# Altium PCB STM32_PCB.PcbDoc
Units mm, origin at the board's own origin, x right, y up, seen from the top; angles counter-clockwise.
Board outline 40.5 x 40 mm, 4 copper layers (L1 (Signal), L2 (GND), L3 (GND), L4 (Signal)), stack 1.57 mm thick; 49 components, 31 nets, 181 pads, 86 vias.
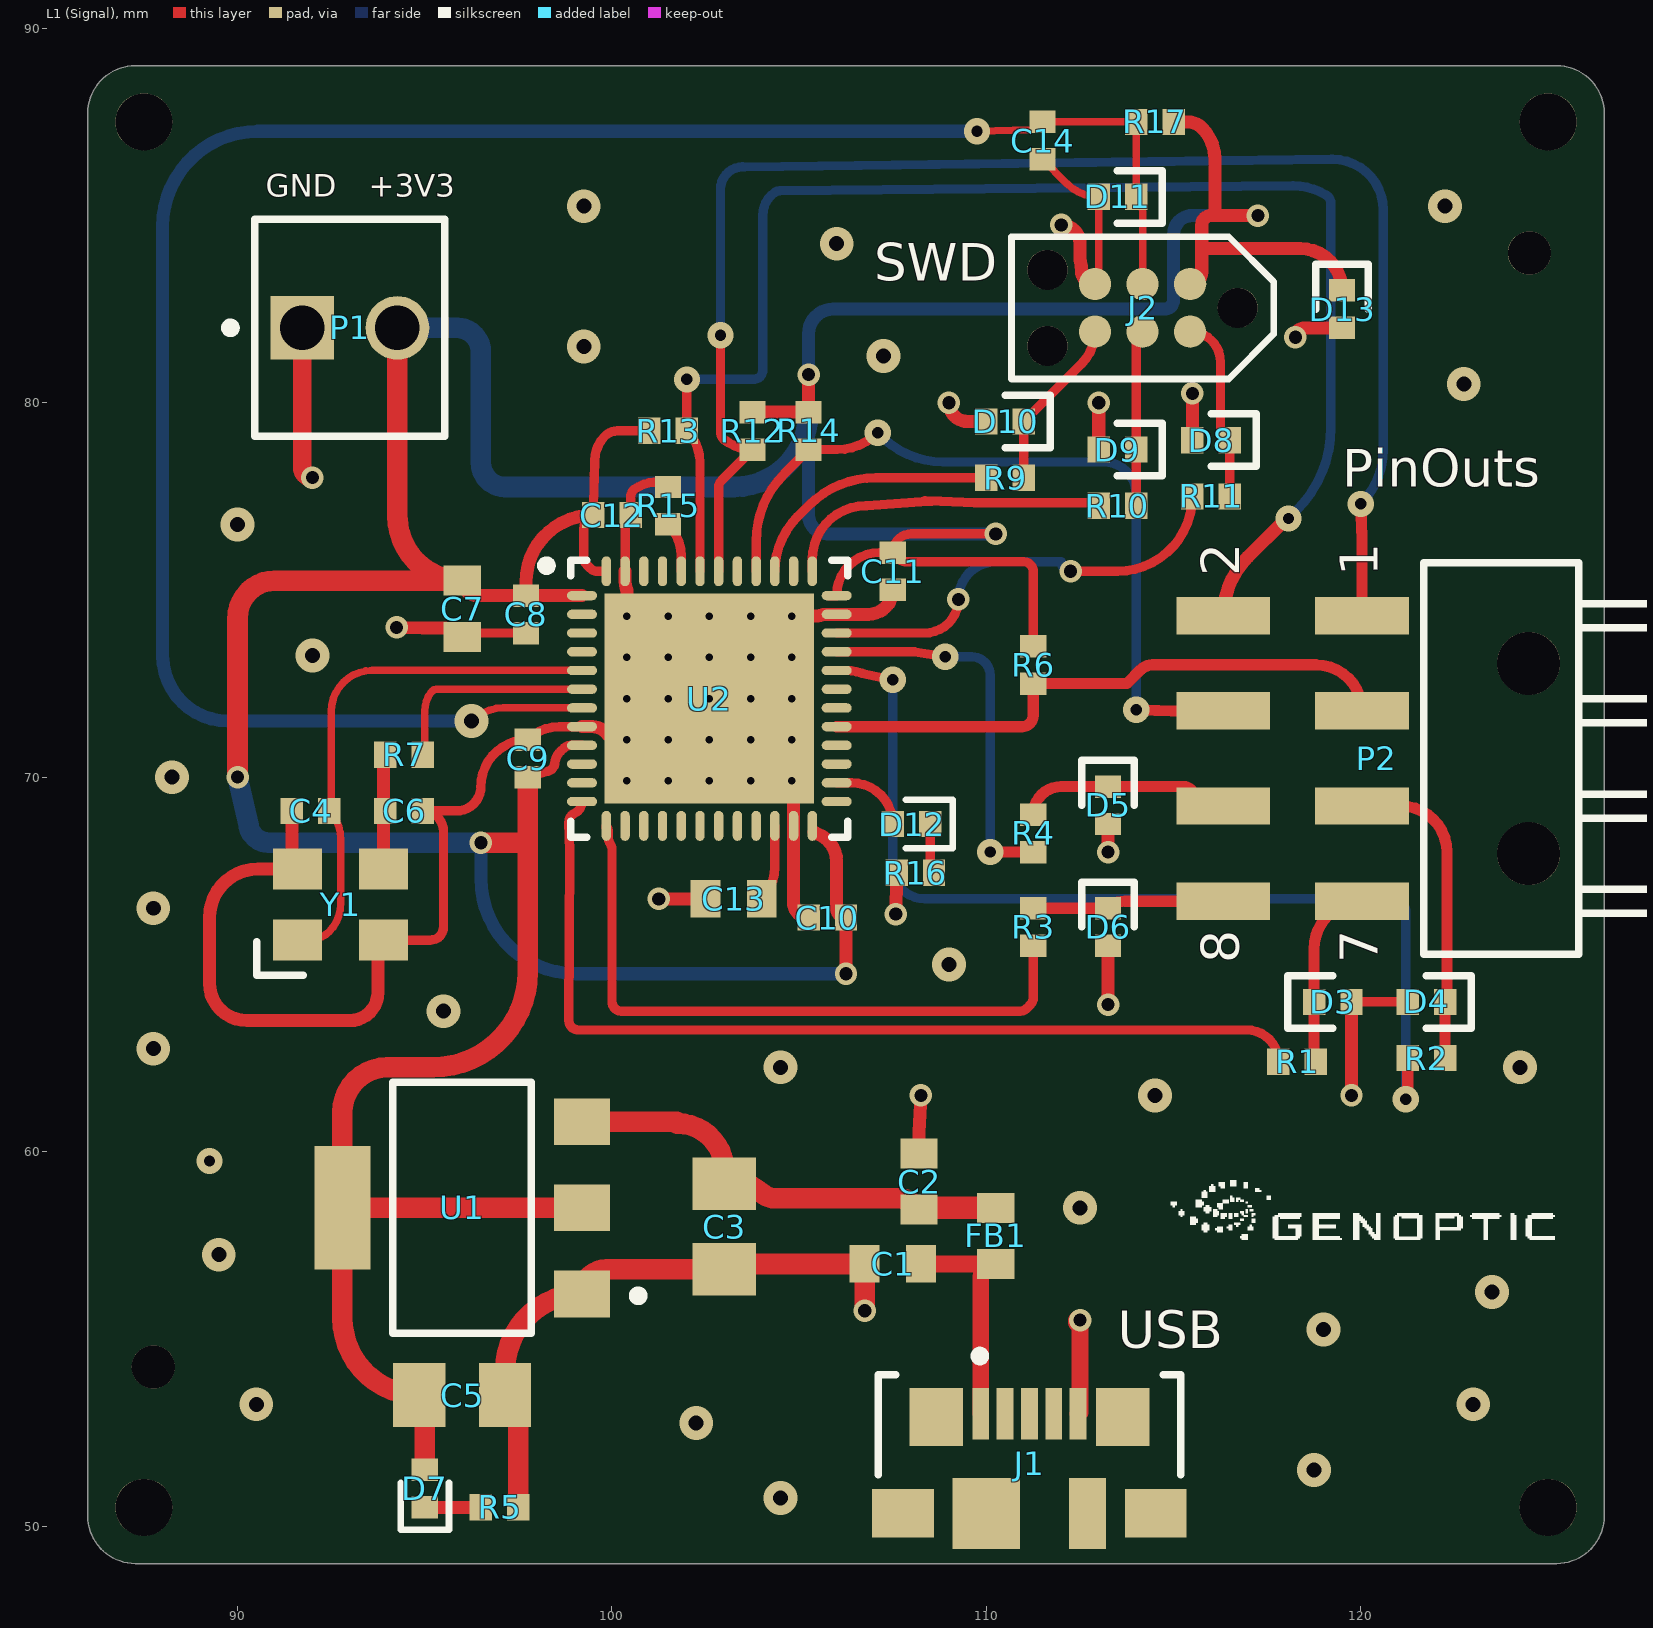
[diagram p0: L1 (Signal) view]
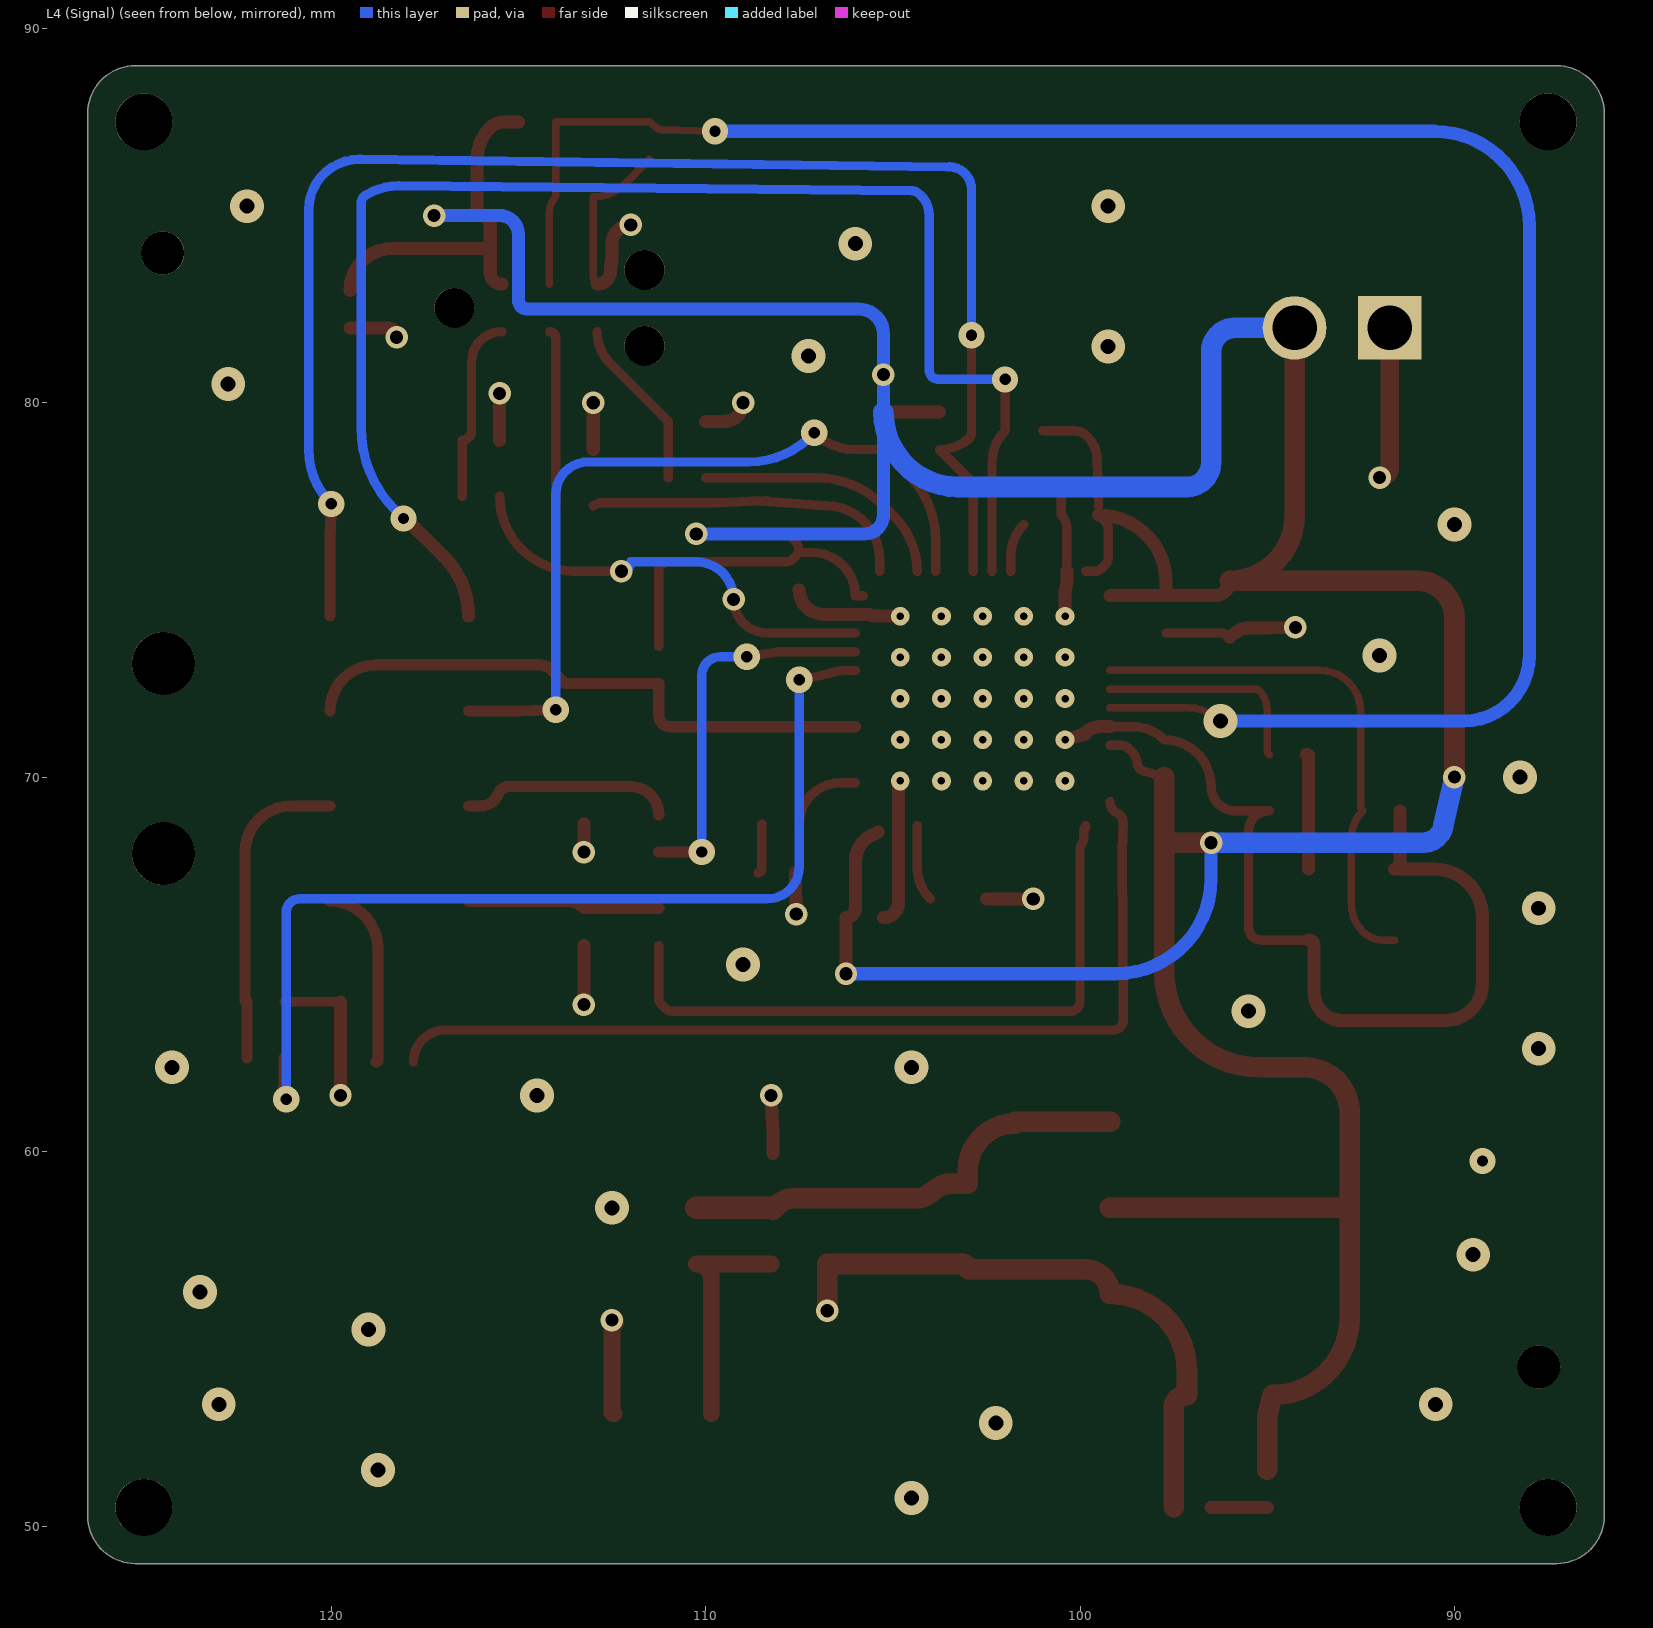
[diagram p1: L4 (Signal) view, seen from below]
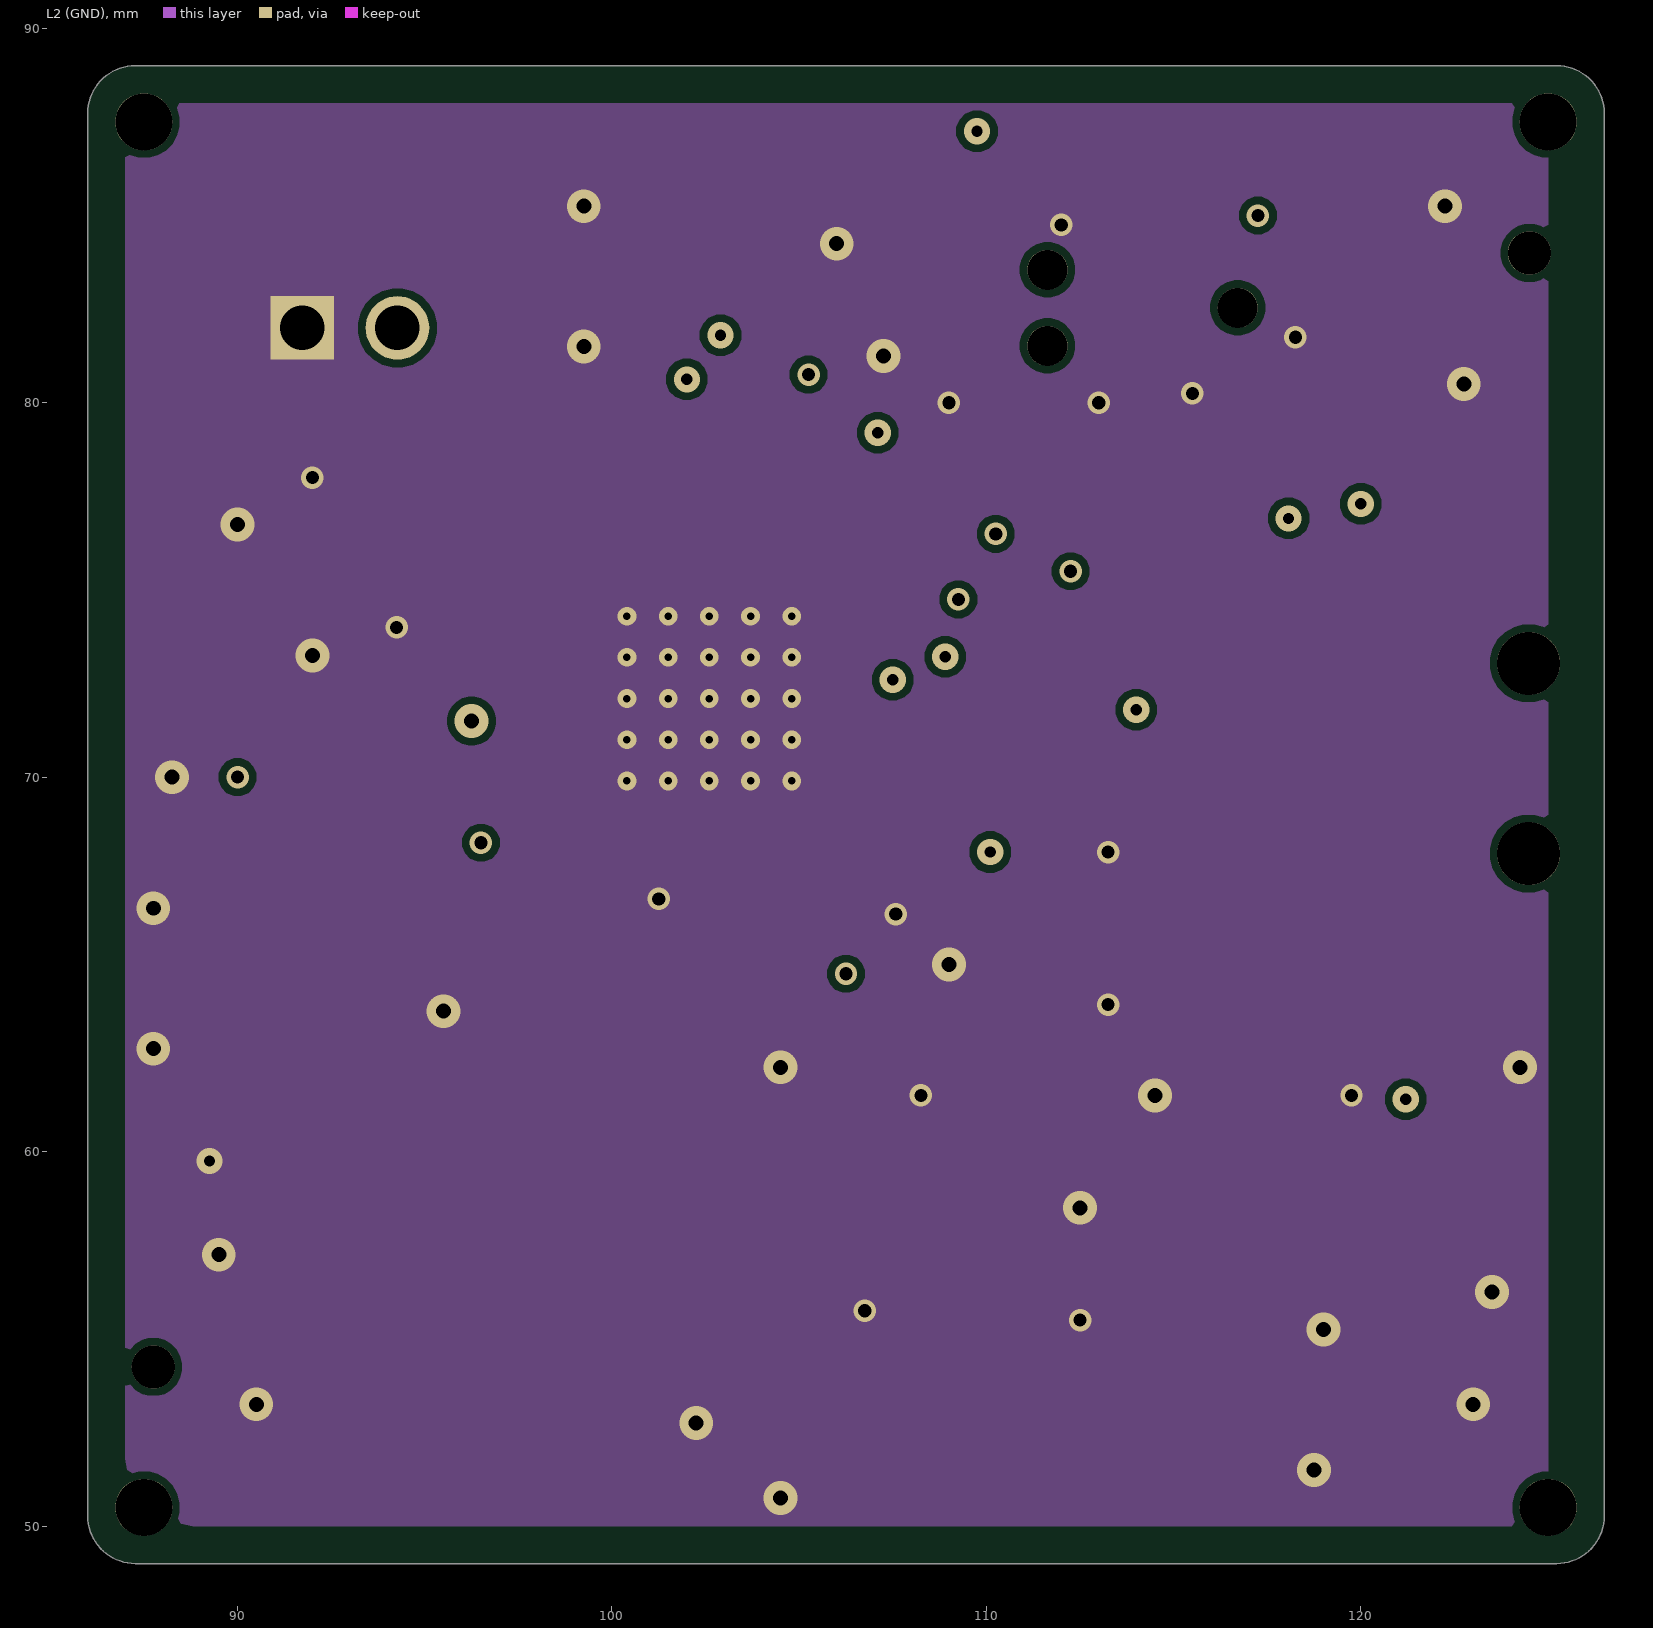
[diagram p2: L2 (GND)]
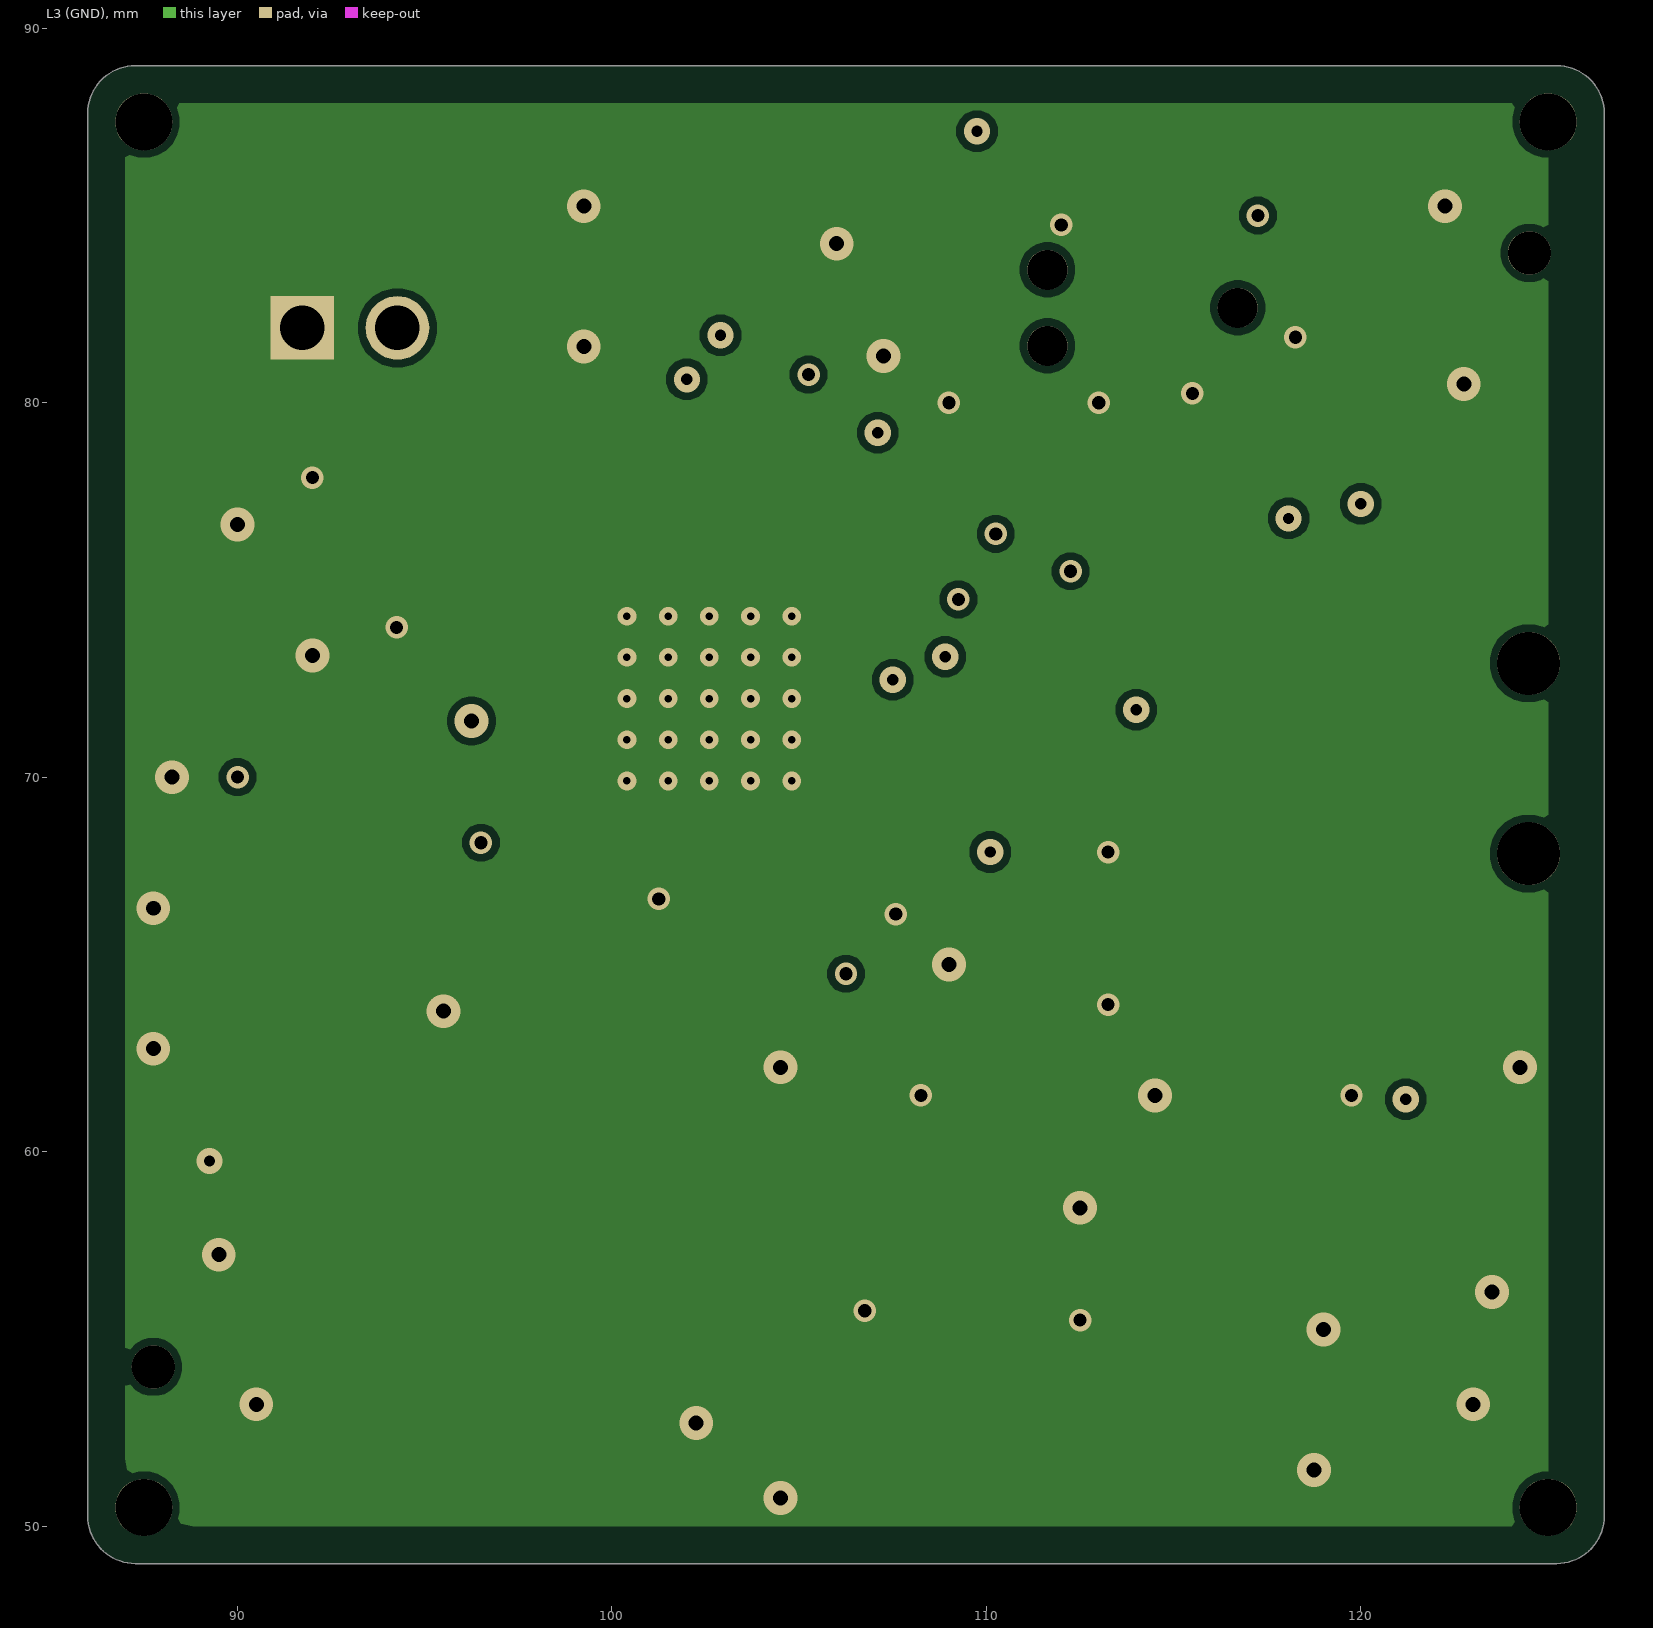
[diagram p3: L3 (GND)]
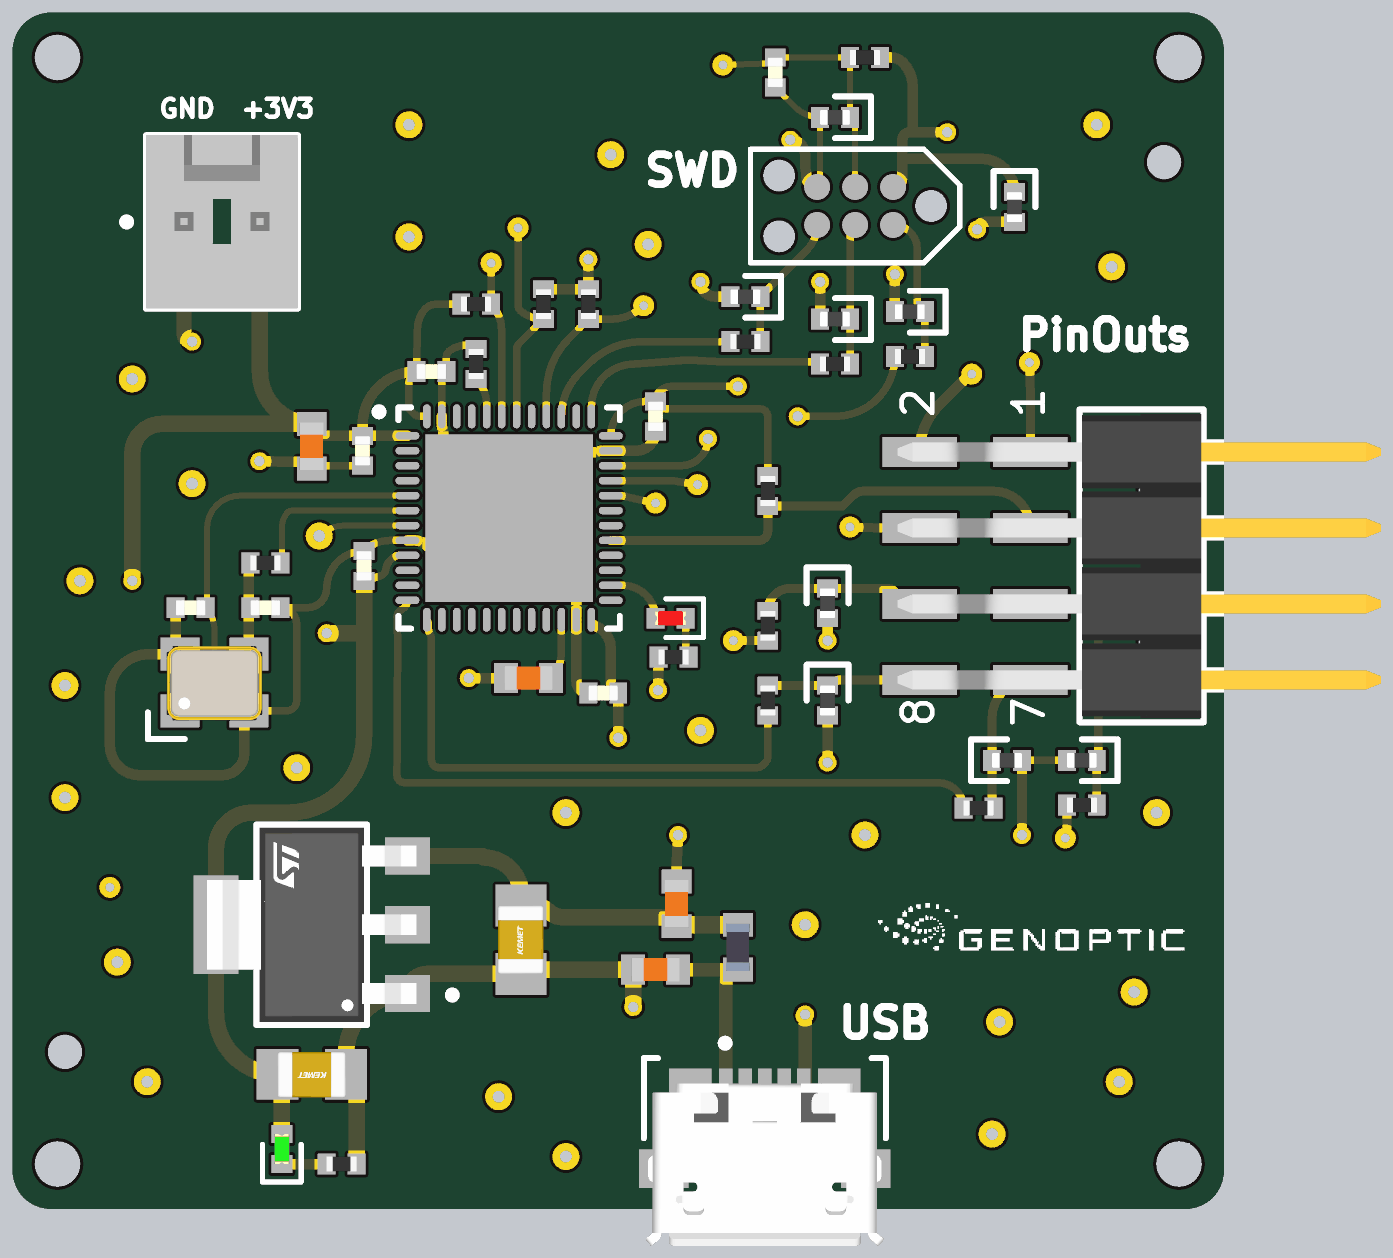
[diagram p4: 3D render of the assembled board from above, using the file's embedded part models]

## Layer stack, top to bottom
Top Solder: solder mask 0.0254, SM-001, Dk 4
L1 (Signal): signal copper 0.035
Dielectric 1: prepreg 0.2, PP-017, Dk 4.6
L2 (GND): signal copper 0.0175
Dielectric 3: core 1.065, Core-039, Dk 4.6
L3 (GND): signal copper 0.0175
Dielectric 5: prepreg 0.2, PP-017, Dk 4.6
L4 (Signal): signal copper 0.035
Bottom Solder: solder mask 0.0254, SM-001, Dk 4

## Board outline
86,50.27 86,87.73 cw(c87.27,87.73) 87.27,89 125.23,89 cw(c125.23,87.73) 126.5,87.73 126.5,50.27 cw(c125.23,50.27) 125.23,49 87.27,49 cw(c87.27,50.27)

## Design rules (kind name [scope] priority, off if disabled: settings)
Clearance [All] p1: gap=0.2 ignorepadtopadclearanceinfootprint=FALSE except(0: Arc-Hole Track-Hole SMDPad-Hole THPad-Hole Via-Hole Fill-Hole Poly-Hole Region-Hole Text-Hole)
PolygonConnect [All] p1: connectstyle=Direct reliefconductorwidth=0.254 reliefentries=4 polygonreliefangle="90 Angle" airgapwidth=0.254
RoutingVias [All] p1: holewidth=0.3 width=0.7 viastyle="Through Hole" minholewidth=0.25 minwidth=0.55 maxholewidth=0.4 maxwidth=0.9
SolderMaskExpansion [All] p1: expansion=0.102 istentingtop=FALSE
UnRoutedNet [All] p1: checkbadconnections=TRUE
Width [All] p1: maxlimit=1 minlimit=0.2 preferedwidth=0.3 midlayer1_minwidth=0.254 midlayer1_maxwidth=0.254 midlayer1_prefwidth=0.254 midlayer2_minwidth=0.254 midlayer2_maxwidth=0.254 midlayer2_prefwidth=0.254 minimp=50.000000 maximp=50.000000 favimp=50.000000
29 further rules are at their usual default settings.

## Components (designator, comment, footprint, x,y, rotation, side; value= is the part's Value field where it differs from the comment)
C1 "2u2" CAP_0603 107.5,57 r0 top
C2 "2u2" CAP_0603 108.2,59.2 r270 top
C3 "100n" CAP_0805 103,58 r90 top
C4 "20p" CAP_0402 91.95,69.1 r0 top
C5 "10u" CAP_0805 96,53.5 r180 top
C6 "20p" CAP_0402 94.45,69.1 r180 top
C7 "2.2u" CAP_0603 96,74.5 r90 top
C8 "100n" CAP_0402 97.7,74.35 r90 top
C9 "100n" CAP_0402 97.75,70.5 r270 top
C10 "100n" CAP_0402 105.75,66.25 r0 top
C11 "100n" CAP_0402 107.5,75.5 r90 top
C12 "100n" CAP_0402 100,77 r180 top
C13 "2.2u" CAP_0603 103.25,66.75 r0 top
C14 "100n" CAP_0402 111.5,87 r90 top
D3 "RCLAMP0521PCT" D_0402 119.25,64 r180 top
D4 "RCLAMP0521PCT" D_0402 121.75,64 r0 top
D5 "RCLAMP0521PCT" D_0402 113.25,69.25 r90 top
D6 "RCLAMP0521PCT" D_0402 113.25,66 r90 top
D7 "GREEN" LED_0402_GREEN 95,51 r270 top
D8 "RCLAMP0521PCT" D_0402 116,79 r0 top
D9 "RCLAMP0521PCT" D_0402 113.5,78.75 r0 top
D10 "RCLAMP0521PCT" D_0402 110.5,79.5 r0 top
D11 "RCLAMP0521PCT" D_0402 113.5,85.5 r0 top
D12 "RED" LED_0402_RED 108,68.75 r0 top
D13 "RCLAMP0521PCT" D_0402 119.5,82.5 r90 top
FB1 "120R" FB_0603 110.25,57.75 r90 top
J1 "473460001" FP-473460001-MFG 111.15,50.69 r0 top
J2 "TC2030-NL" TC2030-NL-FP 114.17,82.535 r180 top
P1 "22-27-2021" MOLX-22-27-2021_V 93,82 r0 top
P2 "610108249121" 610108249121 123.75,70.5 r90 top
R1 "22R" RES_0402 118.3,62.4 r180 top
R2 "22R" RES_0402 121.75,62.5 r180 top
R3 "22R" RES_0402 111.25,66 r90 top
R4 "22R" RES_0402 111.25,68.5 r90 top
R5 "1k" RES_0402 97,50.5 r180 top
R6 "2k2" RES_0402 111.25,73 r90 top
R7 "0R" RES_0402 94.45,70.6 r0 top
R9 "22R" RES_0402 110.5,78 r180 top
R10 "22R" RES_0402 113.5,77.25 r180 top
R11 "22R" RES_0402 116,77.5 r180 top
R12 "2k2" RES_0402 103.75,79.25 r90 top
R13 "2k2" RES_0402 101.5,79.25 r180 top
R14 "2k2" RES_0402 105.25,79.25 r90 top
R15 "10k" RES_0402 101.5,77.25 r270 top
R16 "1k" RES_0402 108.1,67.45 r0 top
R17 "10k" RES_0402 114.5,87.5 r0 top
U1 "LD1117S33CTR" FP-SOT-223-0046067_14-MFG 96,58.5 r180 top
U2 "STM32F411CEU6" STM-UFQFPN48_L 102.6,72.1 r0 top
Y1 "24MHz" XTAL_3225 92.75,66.6 r0 top

## Footprints (in the part's own frame and the unit in brackets; to place one, negate y for a bottom-side part, rotate by r counter-clockwise, add the part's x,y. Pads: shape width x height; smd on the part's side, far side on the other; paste and mask are expansions set on the pad)
610108249121 [mm] "Pin Header, pitch 2.54 mm, SMD, Angled, dual row, 8p"
  rect 1x2.5 smd: 1(3.81,3.72) 2(3.81,7.42) 3(1.27,3.72) 4(1.27,7.42) 5(-1.27,3.72) 6(-1.27,7.42) 7(-3.81,3.72) 8(-3.81,7.42)
  round 1.68 hole 1.68 unplated: MH1(2.54,-0.73) MH2(-2.54,-0.73)
  silkscreen extent -5.23,-8 5.23,2.07, body extent -5.08,-8 5.08,8.16, height 5.1
CAP_0402 [mm]
  rect 0.6x0.7 smd: 1(-0.5,0) 2(0.5,0)
  body extent -0.5,-0.26 0.5,0.26, height 0.37
CAP_0603 [mm]
  rect 0.8x1 smd: 1(-0.75,0) 2(0.75,0)
  body extent -0.8,-0.4 0.8,0.4, height 0.51
CAP_0805 [mm]
  rect 1.4x1.7 smd: 1(-1.143,0) 2(1.143,0)
  body extent -1.15,-0.76 1.15,0.79, height 1.01
D_0402 [mm]
  rect 0.6x0.7 smd: A(-0.5,0) K(0.5,0)
  silkscreen extent 0,-0.7 1.2,0.7, body extent -0.5,-0.25 0.5,0.25, height 0.51
FB_0603 [mm]
  rect 0.8x1 smd: 1(-0.75,0) 2(0.75,0)
  body extent -0.8,-0.4 0.8,0.4, height 0.81
FP-473460001-MFG [mm]
  rect 0.45x1.38 smd paste+0 mask+0: 1(-1.3,2.31) 2(-0.65,2.31) 3(0,2.31) 4(0.65,2.31) 5(1.3,2.31)
  rect 1.425x1.55 smd paste+0 mask+0: 6(-2.488,2.225) 7(2.488,2.225)
  rect 1.65x1.3 smd paste+0 mask+0: 8(-3.375,-0.35) 11(3.375,-0.35)
  rect 1.8x1.9 smd paste+0 mask+0: 9(-1.15,-0.35)
  rect 1x1.9 smd paste+0 mask+0: 10(1.55,-0.35)
  silkscreen extent -4.05,0.67 4.05,3.97, body extent -4.3,-2.48 4.3,3.45, height 0.25
FP-SOT-223-0046067_14-MFG [mm]
  rect 1.5x1.25 smd paste+0 mask+0: 1(-3.2,2.3) 2(-3.2,0) 3(-3.2,-2.3)
  rect 1.5x3.3 smd paste+0 mask+0: 4(3.2,0)
  silkscreen extent -4.83,-3.35 1.85,3.35, body extent -4.05,-3.45 4.05,3.45, height 0.25
LED_0402_GREEN [mm]
  rect 0.6x0.7 smd: A(-0.5,0) K(0.5,0)
  silkscreen extent -0.15,-0.65 1.1,0.65, body extent -0.51,-0.25 0.51,0.25, height 0.45
LED_0402_RED [mm]
  rect 0.6x0.7 smd: A(-0.5,0) K(0.5,0)
  silkscreen extent -0.15,-0.65 1.1,0.65, body extent -0.51,-0.25 0.51,0.25, height 0.45
MOLX-22-27-2021_V [mm] "Header, 2-Leads, Body 5.8x5.08mm"
  rect 1.7x1.7 hole 1.19: 1(-1.27,0)
  round 1.7 hole 1.19: 2(1.27,0)
  silkscreen extent -3.31,-2.9 2.54,2.9, body extent -2.54,-2.9 2.54,2.9, height 11.72
RES_0402 [mm]
  rect 0.6x0.7 smd: 1(-0.5,0) 2(0.5,0)
  body extent -0.5,-0.25 0.5,0.25, height 0.3
STM-UFQFPN48_L [mm] "QFN, 48-Leads, Body 7.1x7.1mm, Pitch 0.5mm, Thermal Pad 5.6x5.6mm, IPC High Density"
  oval 0.8x0.25 smd: 1(-3.4,2.75) 2(-3.4,2.25) 3(-3.4,1.75) 4(-3.4,1.25) 5(-3.4,0.75) 6(-3.4,0.25) 7(-3.4,-0.25) 8(-3.4,-0.75) 9(-3.4,-1.25) 10(-3.4,-1.75) 11(-3.4,-2.25) 12(-3.4,-2.75) 25(3.4,-2.75) 26(3.4,-2.25) 27(3.4,-1.75) 28(3.4,-1.25) 29(3.4,-0.75) 30(3.4,-0.25) 31(3.4,0.25) 32(3.4,0.75) 33(3.4,1.25) 34(3.4,1.75) 35(3.4,2.25) 36(3.4,2.75)
  oval 0.25x0.8 smd: 13(-2.75,-3.4) 14(-2.25,-3.4) 15(-1.75,-3.4) 16(-1.25,-3.4) 17(-0.75,-3.4) 18(-0.25,-3.4) 19(0.25,-3.4) 20(0.75,-3.4) 21(1.25,-3.4) 22(1.75,-3.4) 23(2.25,-3.4) 24(2.75,-3.4) 37(2.75,3.4) 38(2.25,3.4) 39(1.75,3.4) 40(1.25,3.4) 41(0.75,3.4) 42(0.25,3.4) 43(-0.25,3.4) 44(-0.75,3.4) 45(-1.25,3.4) 46(-1.75,3.4) 47(-2.25,3.4) 48(-2.75,3.4)
  rect 5.6x5.6 smd: 49(0,0)
  silkscreen extent -4.47,-3.7 3.7,3.7, body extent -3.55,-3.55 3.55,3.55, height 0.6
TC2030-NL-FP [mil]
  round 33.98 smd: 1(-50,-25) 2(-50,25) 3(0,-25) 4(0,25) 5(50,-25) 6(50,25)
  round 42.01 hole 42.01 unplated: MH(-100,0) MH(100,-40) MH(100,40)
  silkscreen extent -138,-75 138,75
XTAL_3225 [mm]
  rect 1.3x1.1 smd: 1(-1.15,-0.95) 2(1.15,-0.95) 3(1.15,0.95) 4(-1.15,0.95)
  silkscreen extent -2.23,-1.89 -1,-1, body extent -1.6,-1.28 1.6,1.22, height 0.61

## Part data
C1 C2 C7 C13: library part CAP_0603_16V, "Capacitor SMD 0603 16V"
C3 C5: library part CAP_0805_16V, "Capacitor SMD 0805 16V"
C4 C6 C8 C9 C10 C11 C12 C14: library part CAP_0402_16V, "Capacitor SMD 0402 16V"
D3 D4 D5 D6 D8 D9 D10 D11 D13: library part D_TVS_0402, "Diode TVS / ESD 0402"
D7: library part LED_0402_GREEN, "LED 0402 GREEN SMD"
D12: library part LED_0402_RED, "LED 0402 RED SMD"
FB1: library part FB_0603, "Ferrite Bead SMD 0603"
J1: library part CMP-2000-05246-2, "CONN RCPT USB2.0 MICRO B SMD R/A", Current Rating=1.8A, Manufacturer=Molex, Package=0, Temperature="-30°C to +85°C", Temperature Range High=+85°C, Temperature Range Low=-30°C, Voltage Rating=30V, Automotive=No, Category=Conn, ComponentLink2Description=Datasheet, ComponentLink2URL=https://www.molex.com/webdocs/datasheets/pdf/en-us/0473460001_IO_CONNECTORS.pdf, Conn Orientation="Right Angle", Contact Material=Gold,Nickel, Device Class L1=Connectors, Device Class L2="USB Connectors", Device Class L3=unset, Digikey Description="CONN RCPT USB2.0 MICRO B SMD R/A", Footprint Url=https://www.molex.com/pdm_docs/sd/473460001_sd.pdf, Height=2.945mm, Is Female=yes, Lead Free=Yes, Manufacturer Part Number=473460001, Number Of Contacts=5, Octopart=https://octopart.com/47346-0001-molex-7164928, Pitch=0.65mm, RoHS=TRUE, Shielding=true, Usb Standard="USB 2.0"
J2: "Tag-Connect No-Solder SWD Debug Connector (No Legs) DO NOT PLACE", Manufacturer=Tag-Connect, Manufacturer Part Number=TC2030-NL-FP
P1: library part CMP-2000-05537-1, "Male Header, Pitch 2.54 mm, 1 x 2 Position, Height 11.7 mm, Tail Length 3.56 mm, 0 to 75 degC, RoHS, Bulk", Current - Max=4A, Manufacturer=Molex, Operating temperature=0°Cto+75°C, Package Description="2-Leads Header, Body 5.08 x 5.8 mm, Pitch 2.54 mm", Package Version="Rev. BC, 02/2012", PartNumber=0022272021, Voltage - Max=250V, Contact Material=Tinplatedbrass, Current Rating=4A, Datasheet URL=http://www.molex.com/pdm_docs/sd/022272021_sd.pdf, Datasheet Version="Rev. F, 06/2009", Housing material=Nylon(UL94V-0), Manufacturer URL=http://www.molex.com/, Mounting Technology=ThroughHole, No. of Positions=2, No. of Rows=1, Orientation=Vertical, Package Reference=22-27-2021, Pitch=2.54mm, Voltage Rating=250V
P2: library part CMP-1502-01147-1, "SMT Angled Pin Header WR-PHD, Pitch 2.54 mm, Dual Row, 8 pins", Contact Resistance=20mOhm, Manufacturer="Wurth Elektronik", Operating temperature=-40to105degC, Rated Current=3A, Withstanding Voltage=600VAC, Working Voltage=250VAC, Datasheet URL=https://katalog.we-online.de/em/datasheet/6101xx249121.pdf, Gender=Male, Manufacturer URL=http://www.we-online.de, Mounting Technology=SMT, Orientation=Angled, Package Reference=610108249121, Packaging=TapeandReel, Part Number=610108249121, Pin Number=8, Pitch=2.54mm, Publisher=WurthElektronik, Row Number=Dual
R1 R2 R3 R4 R5 R6 R7 R9 R10 R11 R12 R13 R14 R15 R16 R17: library part RES_0402, "Resistor SMD 0402"
U1: library part CMP-0244-00307-2, "IC REG LINEAR 3.3V 800MA SOT223", Case/Package=SOT-223, Dropout Voltage=1.1V, Input Bias Current=5mA, Max Input Voltage=15V, Max Operating Temperature=125°C, Max Output Current=1.3A, Max Output Voltage=3.3V, Max Power Dissipation=12W, Min Input Voltage=5.3V, Min Operating Temperature=-40°C, Output Current=950mA, Output Voltage Accuracy=1%, Package Quantity=1, Quiescent Current=10mA, Accuracy=1%, Contact Plating=Tin, Height=1.8mm, Lead Free="Lead Free", Length=6.5mm, Max Supply Voltage=15V, Min Output Voltage=3.3V, Min Supply Voltage=3.3V, Mount="Surface Mount", Nominal Output Voltage=3.3V, Number of Outputs=1, Number of Pins=4, Number of Regulators=1, Number of Terminals=4, Output Type=Fixed, Output Voltage=3.3V, Packaging="Tape and Reel", Polarity=Positive, Power Dissipation=12W, Radiation Hardening=No, REACH SVHC="No SVHC", Termination=SMD/SMT, Weight=0.01lb, Width=3.5mm
U2: library part CMP-0243-00165-1, "ARM Cortex-M4 32-bit MCU+FPU, 512 KB Flash, 128 KB RAM, 36 I/Os, 48-Pin UFQFPN, -40 to 85 degC, Tray", I/Os (High Current)=36, Operating Frequency(F) (Processor speed) (MHz)=100, Package Description=UFQFPN48, Package Reference="48-Pin Ultra Thin Fine Pitch Quad Flat No-Lead, 7 x 7 x 0.6 mm Body, 0.5 mm Pitch, Exposed Pad", Supply Voltage(Vcc) min (V)=1.7, ComponentLink1Description="Manufacturer URL", ComponentLink1URL=http://www.st.com/, ComponentLink2Description=Datasheet, ComponentLink2URL=http://www.st.com/st-web-ui/static/active/en/resource/technical/document/datasheet/DM00115249.pdf, Core="ARM Cortex-M4", DatasheetVersion="Rev. 6", FLASH Size (Prog) (kB)=512, Internal RAM Size (kB)=128, Mounting Technology="Surface Mount", Packing=Tray
Y1: library part TSX-3225_24.0000MF15X-AC, "Crystal SMD 24MHz 10PPM 7pF 3225", Load Capacitance=7pF, Manufacturer=Epson, Manufacturer Number="TSX-3225 24.0000MF15X-AC", ESR=40R, Type=XTAL

## Free pads (board coordinates)
  round 1.524 hole 1.524 unplated: 2(125,50.5) MH(87.5,50.5) MH(87.5,87.5) MH(125,87.5) TH(0,54)
  round 1.152 hole 1.152 unplated: TH(53.75,27) TH(87.75,54.25) TH(124.5,84)

## Via types
v1: diameter 0.9, hole 0.4, L1 (Signal) to L4 (Signal), 26 vias
v2: diameter 0.5, hole 0.2, L1 (Signal) to L4 (Signal), 25 vias
v3: diameter 0.6, hole 0.35, L1 (Signal) to L4 (Signal), 23 vias
v4: diameter 0.7, hole 0.3, L1 (Signal) to L4 (Signal), 12 vias

## Nets (pads, with @x,y where several pads share a name; then routed paths per layer and width w, separated by ;. In a path a pad name is that pad's centre, name@x,y a point inside that pad or via, vN(x,y) a via of type N, cw(c..) or ccw(c..) an arc to the next point about the centre after c; other vN are vias at no path point)
+3V3: C5.2 C7.2 C8.2 C9.2 C10.2 C11.2 C12.2 D7.A D13.K J2.1 P1.2 R6.2 R12.2 R13.2 R14.2 R17.2 U1.2 U1.4 U2.1 U2.9 U2.24 U2.36 U2.48 | length 152.5
  L1 (Signal) w0.25: C9.2@98.031,70.084 98.299,70.163 ccw(c98.227,70.403) 98.476,70.383 ; 98.476,70.384 cw(c98.925,70.35) 98.629,70.689 ccw(c98.464,70.877) 98.636,70.695 98.728,70.782 cw(c98.899,70.6) 98.898,70.85 U2.9 ; C12.2 99.323,76.823 ccw(c99.5,76.646) 99.25,76.646 99.25,75.854 ccw(c99.5,75.854) 99.323,75.677 99.428,75.572 ccw(c99.604,75.75) 99.602,75.5 U2.48 ; C12.2@99.506,77.234 cw(c99.756,77.234) 99.506,77.239 99.538,78.458 ccw(c99.288,78.465) 99.538,78.459 ; 99.538,78.461 cw(c100.513,78.434) 99.8,79.1 cw(c100.148,78.772) 100.147,79.25 R13.2 ; U2.36@105.788,74.85 U2.36 cw(c107.15,74.85) 107.15,76 C11.2 ; v3(110.25,76.5) 108,76.5 ccw(c108,76) 107.998,76.5 ccw(c108,76) C11.2 ; R6.2 111.25,75.5 ccw(c111,75.5) 111,75.75 107.854,75.75 cw(c107.854,76) 107.678,75.822 C11.2
  L1 (Signal) w0.35: C7.2 ccw(c96.4,75.25) 96.4,74.85 C8.2 ; U2.1 C8.2 ; C12.2 ccw(c99.5,75.2) 97.7,75.2 C8.2 ; R12.2 R14.2 v3(105.25,80.75) ; U2.24@105.4,68.537 ccw(c105.614,68.814) 105.489,68.487 cw(c105.213,67.75) 106,67.75 106,66.5 ccw(c106.25,66.5) C10.2 v3(106.25,64.75) ; R17.2 115.376,87.5 cw(c115.376,86.959) 115.758,87.342 cw(c114.934,86.517) 116.1,86.517 116.1,86.515 116.1,85 ; J2.1 ccw(c115.44,83.48) 115.75,83.48 115.75,84.115 ; v3(117.25,85) 116.1,85 ; D13.K@119.344,83.156 D13.K ccw(c118.385,83) 118.385,84.115 115.75,84.115 ; 115.75,84.115 115.75,84.75 cw(c116,84.75) 116,85 116.1,85
  L1 (Signal) w0.55: v3(90,70) v3(90,70) 90,74.25 cw(c91,74.25) 91,75.25 C7.2 cw(c96,76.98) 94.27,76.98 P1.2 ; D7.A 95,52.925 C5.2 cw(c94.857,55.557) 92.8,55.557 U1.4 ; v3(96.5,68.25) 97.5,68.25 ccw(c97.5,68.5) 97.75,68.5 ; C9.2 97.75,68.5 ; U1.2 U1.4 ; U1.4 92.8,61.05 cw(c94,61.05) 94,62.25 95.21,62.25 ccw(c95.21,64.79) 97.75,64.79 97.75,68.5
  L4 (Signal) w0.35: v3(96.5,68.25) 96.5,67.29 ccw(c99.04,67.29) 99.04,64.75 v3(106.25,64.75) ; v3(110.25,76.5) 105.75,76.5 cw(c105.75,77) 105.25,77 105.25,79.75 v3(105.25,80.75) 105.25,81.847 cw(c105.903,81.847) 105.903,82.5 114.75,82.5 ccw(c114.75,82.75) 115,82.75 115,84.5 cw(c115.5,84.5) 115.5,85 v3(117.25,85)
  L4 (Signal) w0.55: v3(90,70) 90.303,68.679 ccw(c90.839,68.8) 90.839,68.25 v3(96.5,68.25) ; P1.2 95.86,82 cw(c95.86,81.36) 96.5,81.36 96.5,78.399 ccw(c97.149,78.399) 97.149,77.75 103.25,77.75 ccw(c103.25,79.75) 105.25,79.75
+5: C2.2 C3.2 FB1.2 U1.3 | length 12.4
  L1 (Signal) w0.55: U1.3 101.7,60.8 cw(c101.7,60.75) 101.75,60.75 cw(c101.75,59.5) 103,59.5 C3.2 103.473,59.143 cw(c103.473,58.593) 103.795,59.039 104.051,58.854 ccw(c104.373,59.3) 104.371,58.75 107.672,58.75 cw(c107.672,58.2) 108.061,58.589 C2.2 cw(c108.25,58.45) C2.2@108.25,58.5
  L1 (Signal) w0.6: C2.2@108.25,58.5 FB1.2
GND: C1.1 C2.1 C3.1 C4.1 C5.1 C6.1 C7.1 C8.1 C9.1 C10.1 C11.1 C12.1 C13.1 C14.1 D3.A D4.A D5.A D6.A D8.A D9.A D10.A D11.A D13.A J1.5 J2.5 P1.1 R5.1 R15.1 R16.1 U1.1 U2.8 U2.23 U2.35 U2.47 U2.49 Y1.2 Y1.4 | length 85.2
  L1 (Signal) w0.2: C14.1 112.146,85.854 ccw(c113,86.707) D11.A 113,83.411 cw(c112.659,83.411) J2.5
  L1 (Signal) w0.25: Y1.2 95.15,65.65 ccw(c95.15,66) 95.5,66 95.5,68.55 ccw(c94.95,68.55) C6.1 95.85,69.1 ccw(c95.85,69.75) 96.5,69.75 cw(c97.75,69.75) C9.1 cw(c98.595,70.155) 98.595,71.35 U2.8 ; C7.1 cw(c96.241,73.509) 96.241,73.85 C8.1 ; U2.47 100.35,76.638 cw(c100.862,76.638) C12.1 100.5,77.488 cw(c100.75,77.487) 100.598,77.686 cw(c101.181,76.919) 101.12,77.88 cw(c101.135,77.631) 101.231,77.862 R15.1 ; D3.A D4.A
  L1 (Signal) w0.35: C4.1 91.45,67.7 ccw(c91.6,67.7) Y1.4 90.55,67.55 ccw(c90.55,66.25) 89.25,66.25 89.25,64.5 ccw(c90.25,64.5) 90.25,63.5 93,63.5 ccw(c93,64.25) 93.75,64.25 93.75,65.5 cw(c93.9,65.5) Y1.2 ; v3(94.25,74) 95.569,73.977 cw(c95.563,73.627) 95.761,73.915 95.762,73.915 C7.1 ; U2.8 99.475,71.35 cw(c99.475,70.85) 99.866,71.162 ccw(c100.138,71.382) 99.9,71.125 99.975,71.125 v2(100.4,71) ; U2.47 100.35,75.225 ccw(c100.85,75.225) 100.38,75.055 cw(c100.05,74.938) 100.4,74.939 v2(100.4,74.3) ; v3(101.25,66.75) C13.1 ; v2(104.8,69.9) cw(c104.8,69.85) 104.85,69.85 U2.23 104.85,66.65 ccw(c105.25,66.65) C10.1 ; v2(104.8,74.3) 105.439,74.3 ccw(c105.438,74.65) 105.555,74.32 cw(c105.725,73.85) 105.725,74.35 U2.35 106.85,74.35 ccw(c106.85,75) C11.1 ; v3@107.58,66.344 ccw(c107.231,66.363) v3@107.581,66.355 ; v3@107.581,66.356 107.6,67.33 ccw(c107.25,67.337) R16.1@107.6,67.343 ; R16.1 107.6,67.364 ccw(c107.95,67.364) 107.6,67.356 R16.1@107.6,67.344 ; C2.1 108.2,60.5 cw(c108.55,60.5) 108.2,60.518 v3(108.25,61.5) ; v3(109,80) ccw(c109.5,80) 109.5,79.5 D10.A ; v3(112,84.75) cw(c112,84.25) 112.5,84.25 112.5,83.859 ccw(c112.85,83.86) 112.51,83.775 cw(c111.63,83.551) 112.538,83.528 ccw(c112.888,83.521) 112.8,83.183 ccw(c112.9,83.57) J2.5 ; D9.A v3(113,80) ; v3(113.25,63.925) 113.25,64.925 D6.A ; v3(113.25,68) D5.A ; D8.A v3(115.5,80.25) ; v3(118.25,81.75) cw(c118.5,81.75) 118.5,82 D13.A ; v3(119.75,61.5) D3.A
  L1 (Signal) w0.45: J1.5 ccw(c112.45,53.05) 112.5,53.05 v3(112.5,55.5)
  L1 (Signal) w0.5: P1.1 91.73,78.27 ccw(c92,78.27) v3(92,78)
  L1 (Signal) w0.55: R5.1 97.5,53.143 ccw(c97.143,53.143) C5.1 97.143,54.143 cw(c99.2,54.143) U1.1 cw(c99.857,56.2) 99.857,56.857 C3.1 cw(c103.143,56.857) 103.143,57 C1.1 v3(106.75,55.75) ; v3@112.45,55.45 cw(c112.5,55.45) v3(112.5,55.5)
  other v1: 104.5,50.75 118.75,51.5 102.25,52.75 90.5,53.25 123,53.25 119,55.25 123.5,56.25 89.5,57.25 112.5,58.5 114.5,61.5 104.5,62.25 124.25,62.25 87.75,62.75 95.5,63.75 109,65 87.75,66.5 88.25,70 92,73.25 90,76.75 122.75,80.5 107.25,81.25 99.25,81.5 106,84.25 99.25,85.25 122.25,85.25
  other v2: 100.4,69.9 101.5,69.9 102.6,69.9 103.7,69.9 101.5,71 102.6,71 103.7,71 104.8,71 100.4,72.1 101.5,72.1 102.6,72.1 103.7,72.1 104.8,72.1 100.4,73.2 101.5,73.2 102.6,73.2 103.7,73.2 104.8,73.2 101.5,74.3 102.6,74.3 103.7,74.3
  other v3: 107.58,66.343
  other v4: 89.25,59.75
LED_PWR_K: D7.K R5.2 | length 1.5
  L1 (Signal) w0.35: D7.K R5.2
MCU_BOOT0: R15.2 U2.44 | length 1.3
  L1 (Signal) w0.25: R15.2 cw(c100.655,75.905) 101.85,75.905 U2.44
MCU_LED_A: D12.A U2.26 | length 2.1
  L1 (Signal) w0.25: U2.26 106.4,69.85 cw(c106.4,68.75) D12.A
MCU_LED_K: D12.K R16.2 | length 1.4
  L1 (Signal) w0.25: D12.K 108.5,67.55 ccw(c108.6,67.55) R16.2
MCU_NRST: C14.2 D11.K J2.3 R17.1 U2.7 | length 55.6
  L1 (Signal) w0.2: v1(96.25,71.5) cw(c97.095,70.655) 97.095,71.85 U2.7 ; v4(109.75,87.25) 111.179,87.297 cw(c111.186,87.097) 111.181,87.297 ccw(c111.176,87.497) 111.301,87.341 C14.2 R17.1 D11.K cw(c113.59,85.09) 114.17,85.09 J2.3
  L4 (Signal) w0.35: v1(96.25,71.5) 89.75,71.5 cw(c89.75,73.25) 88,73.25 88,84.71 cw(c90.54,84.71) 90.54,87.25 v4(109.75,87.25)
MCU_OSC_IN: C4.2 U2.5 Y1.1 | length 14.3
  L1 (Signal) w0.2: Y1.1 91.905,65.65 ccw(c91.905,66.418) 92.448,65.874 ccw(c91.72,66.604) 92.75,66.604 ; 92.75,66.605 92.75,68.376 ccw(c91.726,68.376) C4.2 ccw(c92.329,69.221) 92.5,69.221 92.5,71.75 cw(c93.6,71.75) 93.6,72.85 U2.5
MCU_OSC_OUT: R7.2 U2.6 | length 5.8
  L1 (Signal) w0.2: R7.2 ccw(c94.829,70.721) 95,70.721 95,71.766 ; 95,71.767 cw(c95.824,71.767) 95.174,72.274 cw(c95.331,72.15) 95.331,72.35 U2.6
MCU_SCL1: P2.1 R12.1 U2.42 | length 41
  L1 (Signal) w0.25: U2.42 102.85,77.746 cw(c103.1,77.746) 102.923,77.923 R12.1 cw(c103.75,79.952) 102.992,79.019 cw(c103.15,79.213) 102.9,79.212 v4(102.9,81.802)
  L1 (Signal) w0.3: v4(120,77.3) 120.03,76.36 cw(c119.73,76.35) 120.03,76.35 P2.1
  L4 (Signal) w0.25: v4(102.9,81.802) 102.9,85.707 ; 102.9,85.708 cw(c103.492,85.707) 103.486,86.298 cw(c103.488,86.048) 103.513,86.297 ccw(c103.537,86.546) 103.539,86.296 119.217,86.501 cw(c119.22,86.251) 119.233,86.501 ; 119.234,86.501 ccw(c119.25,86.75) 119.25,86.5 cw(c119.25,85.15) 120.6,85.15 120.6,78.749 cw(c118.551,78.749) v4(120,77.3)
MCU_SCL3: P2.3 R6.1 U2.29 | length 15.9
  L1 (Signal) w0.3: U2.29 110.95,71.35 ccw(c110.95,71.65) 111.25,71.65 R6.1 113.75,72.5 114.12,72.87 cw(c114.434,72.556) 114.434,73 118.8,73 cw(c118.8,71.77) P2.3
MCU_SDA1: P2.2 R13.1 U2.43 | length 39.1
  L1 (Signal) w0.25: v4(102,80.625) R13.1 cw(c101.155,78.405) 102.35,78.405 U2.43
  L1 (Signal) w0.35: P2.2 cw(c118.551,74.31) 116.981,75.881 v4@117.925,76.825
  L4 (Signal) w0.25: v4(102,80.625) 103.778,80.625 ccw(c103.778,80.875) 104.028,80.875 104.028,85.007 cw(c104.775,85.007) 104.339,85.613 cw(c104.485,85.41) 104.483,85.66 118.187,85.797 cw(c118.19,85.547) 118.19,85.797 cw(c118.189,84.119) 119.084,85.538 cw(c118.95,85.327) 119.2,85.327 119.2,79.338 119.2,79.336 cw(c116.074,79.336) 118.283,77.125 v4(118.071,76.912)
MCU_SDA3: P2.4 R14.1 U2.40 | length 21.4
  L1 (Signal) w0.25: U2.40 103.85,76.298 cw(c106.39,76.298) 104.594,78.094 R14.1 106.014,78.75 ccw(c106.014,80.286) v4(107.1,79.2)
  L1 (Signal) w0.3: v4(114,71.8) 114.94,71.77 ccw(c114.95,72.07) 114.95,71.77 P2.4
  L4 (Signal) w0.25: v4@107.104,79.2 cw(c106.925,79.026) 107.11,79.194 ccw(c108.85,80.76) 108.839,78.419 113.134,78.419 cw(c113.134,77.553) 114,77.553 v4(114,71.8)
MCU_SWCLK: R10.2 U2.37 | length 9
  L1 (Signal) w0.25: U2.37 105.35,75.819 cw(c106.781,75.819) 106.781,77.25 ccw(c106.781,77.5) 106.799,77.251 108.452,77.373 108.36,77.381 cw(c99.839,-134.649) 108.526,77.374 108.527,77.374 ccw(c108.537,77.624) 108.537,77.374 108.748,77.375 cw(c108.75,76.75) 108.784,77.374 109.682,77.325 ccw(c109.7,77.65) 109.7,77.325 112.825,77.325 R10.2
MCU_SWDIO: R11.2 U2.34 | length 11.9
  L1 (Signal) w0.25: U2.34 108.35,73.85 ccw(c108.35,74.75) v3(109.25,74.75) ; v3(112.25,75.5) 113.5,75.5 ccw(c113.5,77.5) R11.2
  L4 (Signal) w0.25: v3(109.25,74.75) cw(c110.25,74.75) 110.25,75.75 112,75.75 ccw(c112.25,75.75) v3(112.25,75.5)
MCU_SWO: R9.2 U2.39 | length 7
  L1 (Signal) w0.25: U2.39 cw(c106.402,75.5) 104.951,76.951 105.256,77.256 cw(c107.052,75.46) 107.052,78 R9.2
MCU_VCAP1: C13.2 U2.22 | length 2
  L1 (Signal) w0.25: C13.2 ccw(c103.155,67.595) 104.35,67.595 U2.22
NetD3_K: D3.K P2.7 R1.1 | length 5
  L1 (Signal) w0.3: R1.1 cw(c118.8,62.45) 118.75,62.45 D3.K 118.75,65.41 cw(c120.03,65.41) P2.7
NetD4_K: D4.K P2.5 R2.1 | length 8.5
  L1 (Signal) w0.3: P2.5 121.07,69.23 cw(c121.07,68) 122.3,68 122.3,64.05 cw(c122.25,64.05) D4.K R2.1
NetD5_K: D5.K P2.6 R4.2 | length 5.7
  L1 (Signal) w0.3: R4.2 cw(c112,69) 112,69.75 D5.K 115.258,69.75 cw(c115.257,69.45) 115.536,69.561 ccw(c116.02,69.75) 116.02,69.23 P2.6
NetD6_K: D6.K P2.8 R3.2 | length 5.1
  L1 (Signal) w0.3: R3.2 D6.K cw(c113.709,66.041) 113.709,66.69 P2.8
NetD8_K: D8.K J2.2 R11.1 | length 5
  L1 (Signal) w0.25: J2.2 cw(c115.44,81.09) 116.25,81.09 116.25,79.25 ccw(c116.5,79.25) D8.K R11.1
NetD9_K: D9.K J2.4 R10.1 | length 4.7
  L1 (Signal) w0.25: R10.1 D9.K 114,81.73 cw(c114.17,81.73) J2.4
NetD10_K: D10.K J2.6 R9.1 | length 4.6
  L1 (Signal) w0.25: R9.1 D10.K 112.546,81.046 ccw(c111.693,81.9) J2.6
USART_2_RX: R3.1 U2.13 | length 17.7
  L1 (Signal) w0.25: U2.13 99.85,68.65 99.879,68.65 cw(c99.65,68.55) 99.9,68.55 99.9,68.425 ccw(c100.35,68.425) 99.966,68.191 cw(c99.751,68.062) 100.001,68.063 100.001,64.003 ccw(c100.251,64.003) 100.251,63.753 110.9,63.753 ccw(c110.9,64.003) 111.076,63.826 111.177,63.927 ccw(c111,64.104) 111.25,64.104 R3.1
USART_2_TX: R1.2 U2.12 | length 25.6
  L1 (Signal) w0.25: U2.12 cw(c98.85,69.35) 98.996,69.032 ccw(c99.1,68.805) 98.923,68.981 ccw(c99.1,68.805) 98.85,68.797 98.875,68.02 cw(c98.25,68) 98.875,67.997 98.85,63.502 ccw(c99.1,63.5) 99.1,63.25 116.95,63.25 cw(c116.95,62.4) R1.2
USART_6_RX: R4.1 U2.33 | length 10.3
  L1 (Signal) w0.25: U2.33 108.049,73.35 cw(c108.049,73.1) 108.089,73.347 v4(108.901,73.217)
  L1 (Signal) w0.3: v4(110.1,68) R4.1
  L4 (Signal) w0.25: v4(108.901,73.217) 109.608,73.217 cw(c109.608,72.725) 110.1,72.725 v4(110.1,68)
USART_6_TX: R2.2 U2.32 | length 27
  L1 (Signal) w0.25: U2.32 106.255,72.85 cw(c106.255,71.655) 106.651,72.782 ccw(c106.735,73.018) 106.684,72.773 v4(107.5,72.6)
  L1 (Signal) w0.3: v4(121.2,61.4) ccw(c121.2,61.45) 121.25,61.45 R2.2
  L4 (Signal) w0.25: v4(107.5,72.6) 107.5,67.603 ccw(c108.353,67.603) 108.353,66.75 120.846,66.75 cw(c120.846,66.396) 121.2,66.396 v4(121.2,61.4)
VBUS: C1.2 FB1.1 J1.1 | length 6.2
  L1 (Signal) w0.45: C1.2 FB1.1 ccw(c110.25,56.6) 109.85,56.6 J1.1
XTAL_IN: C6.2 R7.1 Y1.3 | length 3.1
  L1 (Signal) w0.35: Y1.3 93.9,70.55 cw(c93.95,70.55) R7.1
pads on no net: J1.2 J1.3 J1.4 J1.6 J1.7 J1.8 J1.9 J1.10 J1.11 J2.MH P2.MH1 P2.MH2 U2.2 U2.3 U2.4 U2.10 U2.11 U2.14 U2.15 U2.16 U2.17 U2.18 U2.19 U2.20 U2.21 U2.25 U2.27 U2.28 U2.30 U2.31 U2.38 U2.41 U2.45 U2.46

## Polygon pours and split planes (outlines as drawn)
GND on L2 (GND) "GND_L02_P002" (solid, pour order 2): 87,87 cw(c88,87) 88,88 124,88 cw(c124,87) 125,87 125,51 cw(c124,51) 124,50 89,50 cw(c89,52) 87,52
GND on L3 (GND) "GND_L03_P003" (solid, pour order 3): 87,87 cw(c88,87) 88,88 124,88 cw(c124,87) 125,87 125,51 cw(c124,51) 124,50 89,50 cw(c89,52) 87,52

## Silkscreen, mask and mechanical layers (free items; w line width, h text height)
Top Overlay:
  drawing of 44 lines, arcs and shapes, not listed
  text "GND" at 90.754,85.504 h0.6
  text "+3V3" at 93.504,85.504 h0.6
  text "SWD" at 107.004,83.254 h1
  text "PinOuts" at 119.504,77.754 h1
  text "USB" at 113.504,54.754 h1
Mechanical 1:
  lines w0.254: 86,50.27 ccw(c87.27,50.27) 87.27,49 125.23,49 ccw(c125.23,50.27) 126.5,50.27 126.5,87.73 ccw(c125.23,87.73) 125.23,89 87.27,89 ccw(c87.27,87.73) 86,87.73 86,86.5 86,50.27

## Text inside footprints (layer, text, board x,y; h text height)
P2: Top Overlay "2" at 116.75,75.37 h1.02 r90; Top Overlay "1" at 120.45,75.37 h1.02 r90; Top Overlay "8" at 116.75,65.03 h1.02 r90; Top Overlay "7" at 120.45,65.03 h1.02 r90